# Altium PCB TD_B.pcbdoc
Units mm, origin at the board's own origin, x right, y up, seen from the top; angles counter-clockwise.
Board outline 50.67 x 54.53 mm, 2 copper layers (Top Layer, Bottom Layer); 4 components, 2 nets, 7 pads, 0 vias.
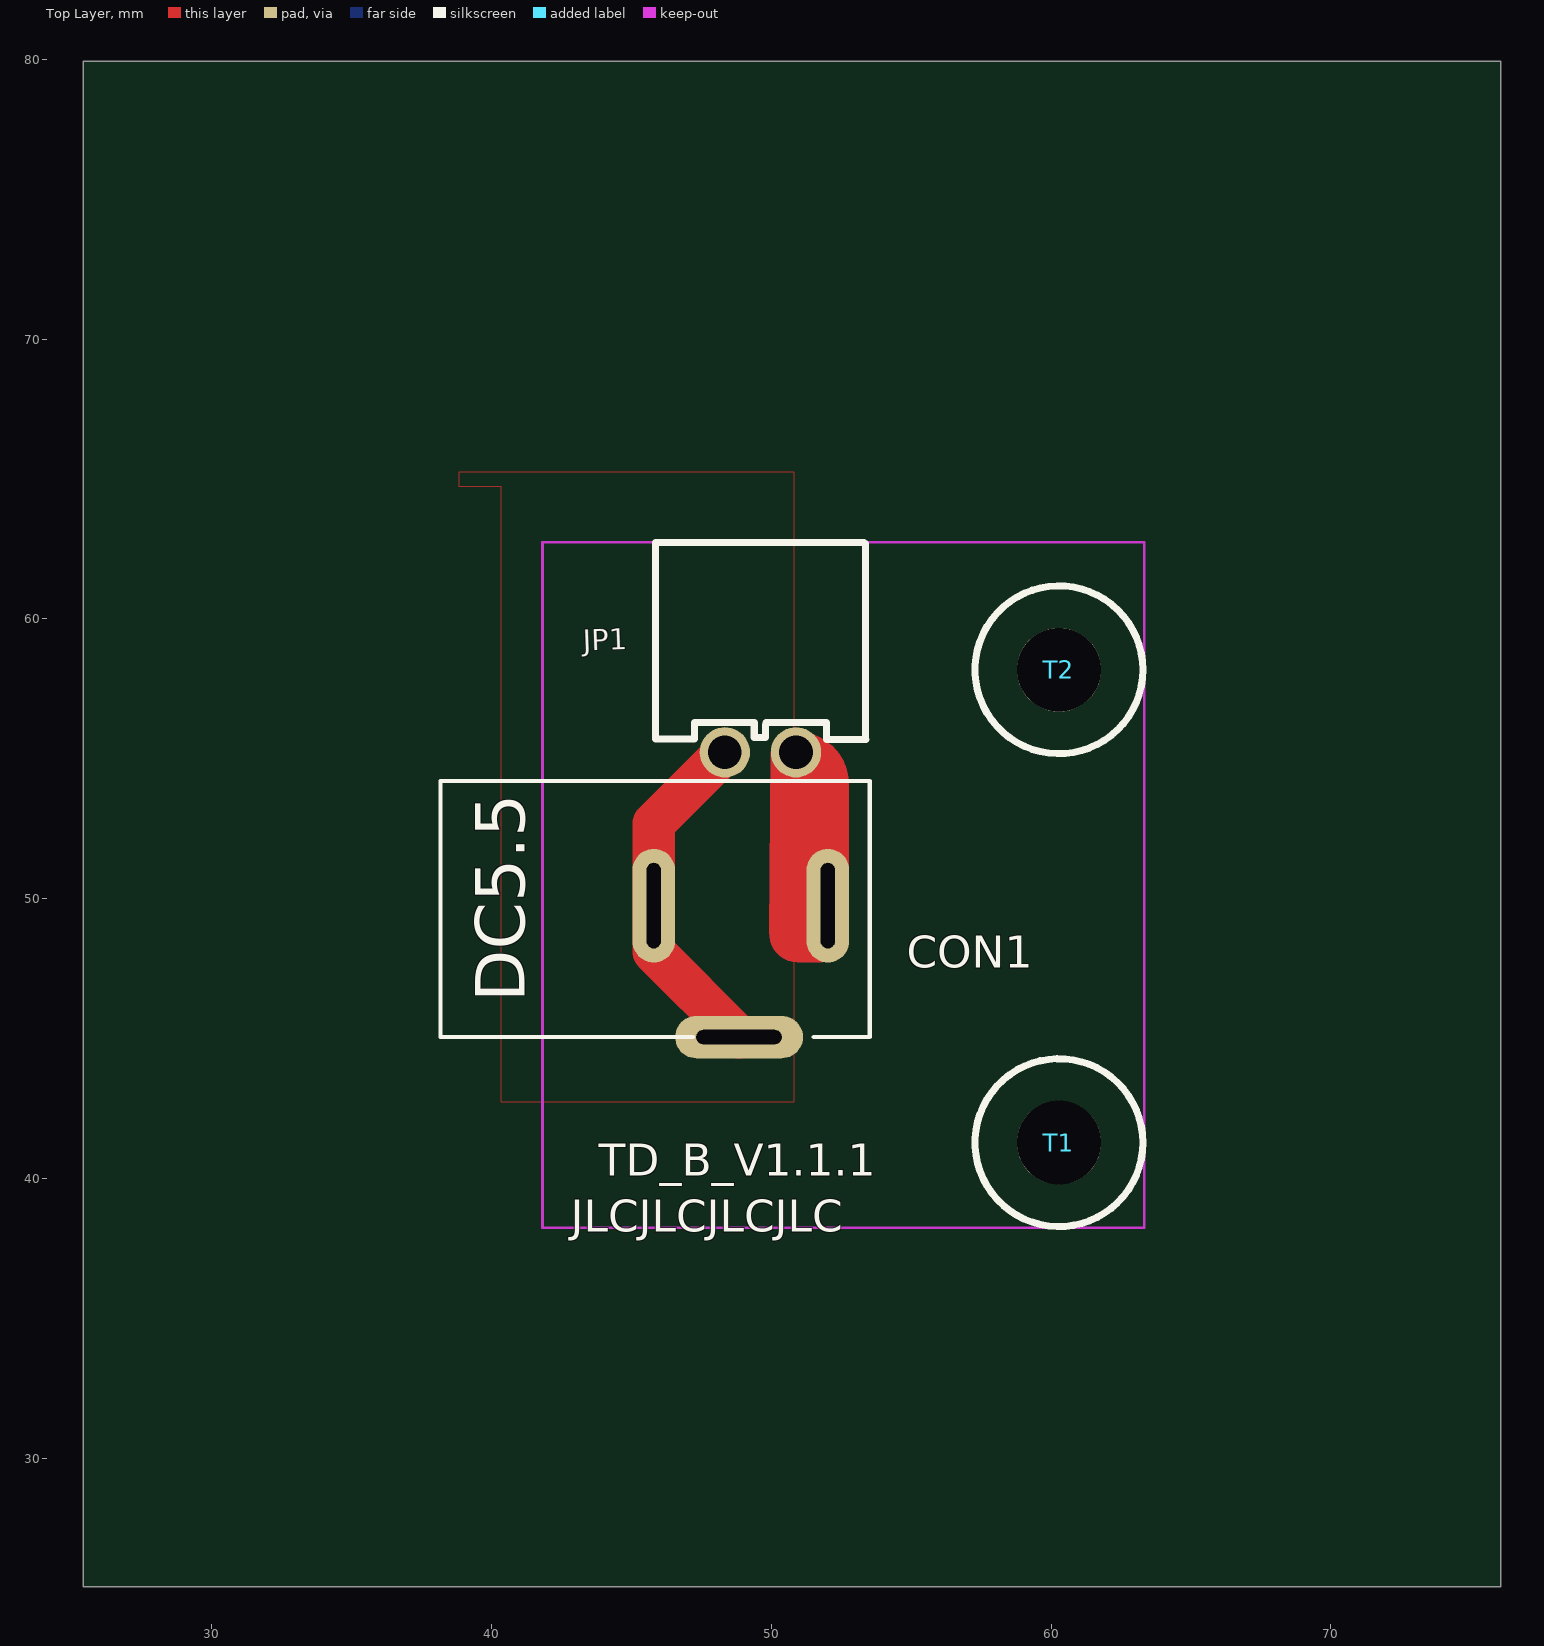
[diagram p0: Top Layer view]
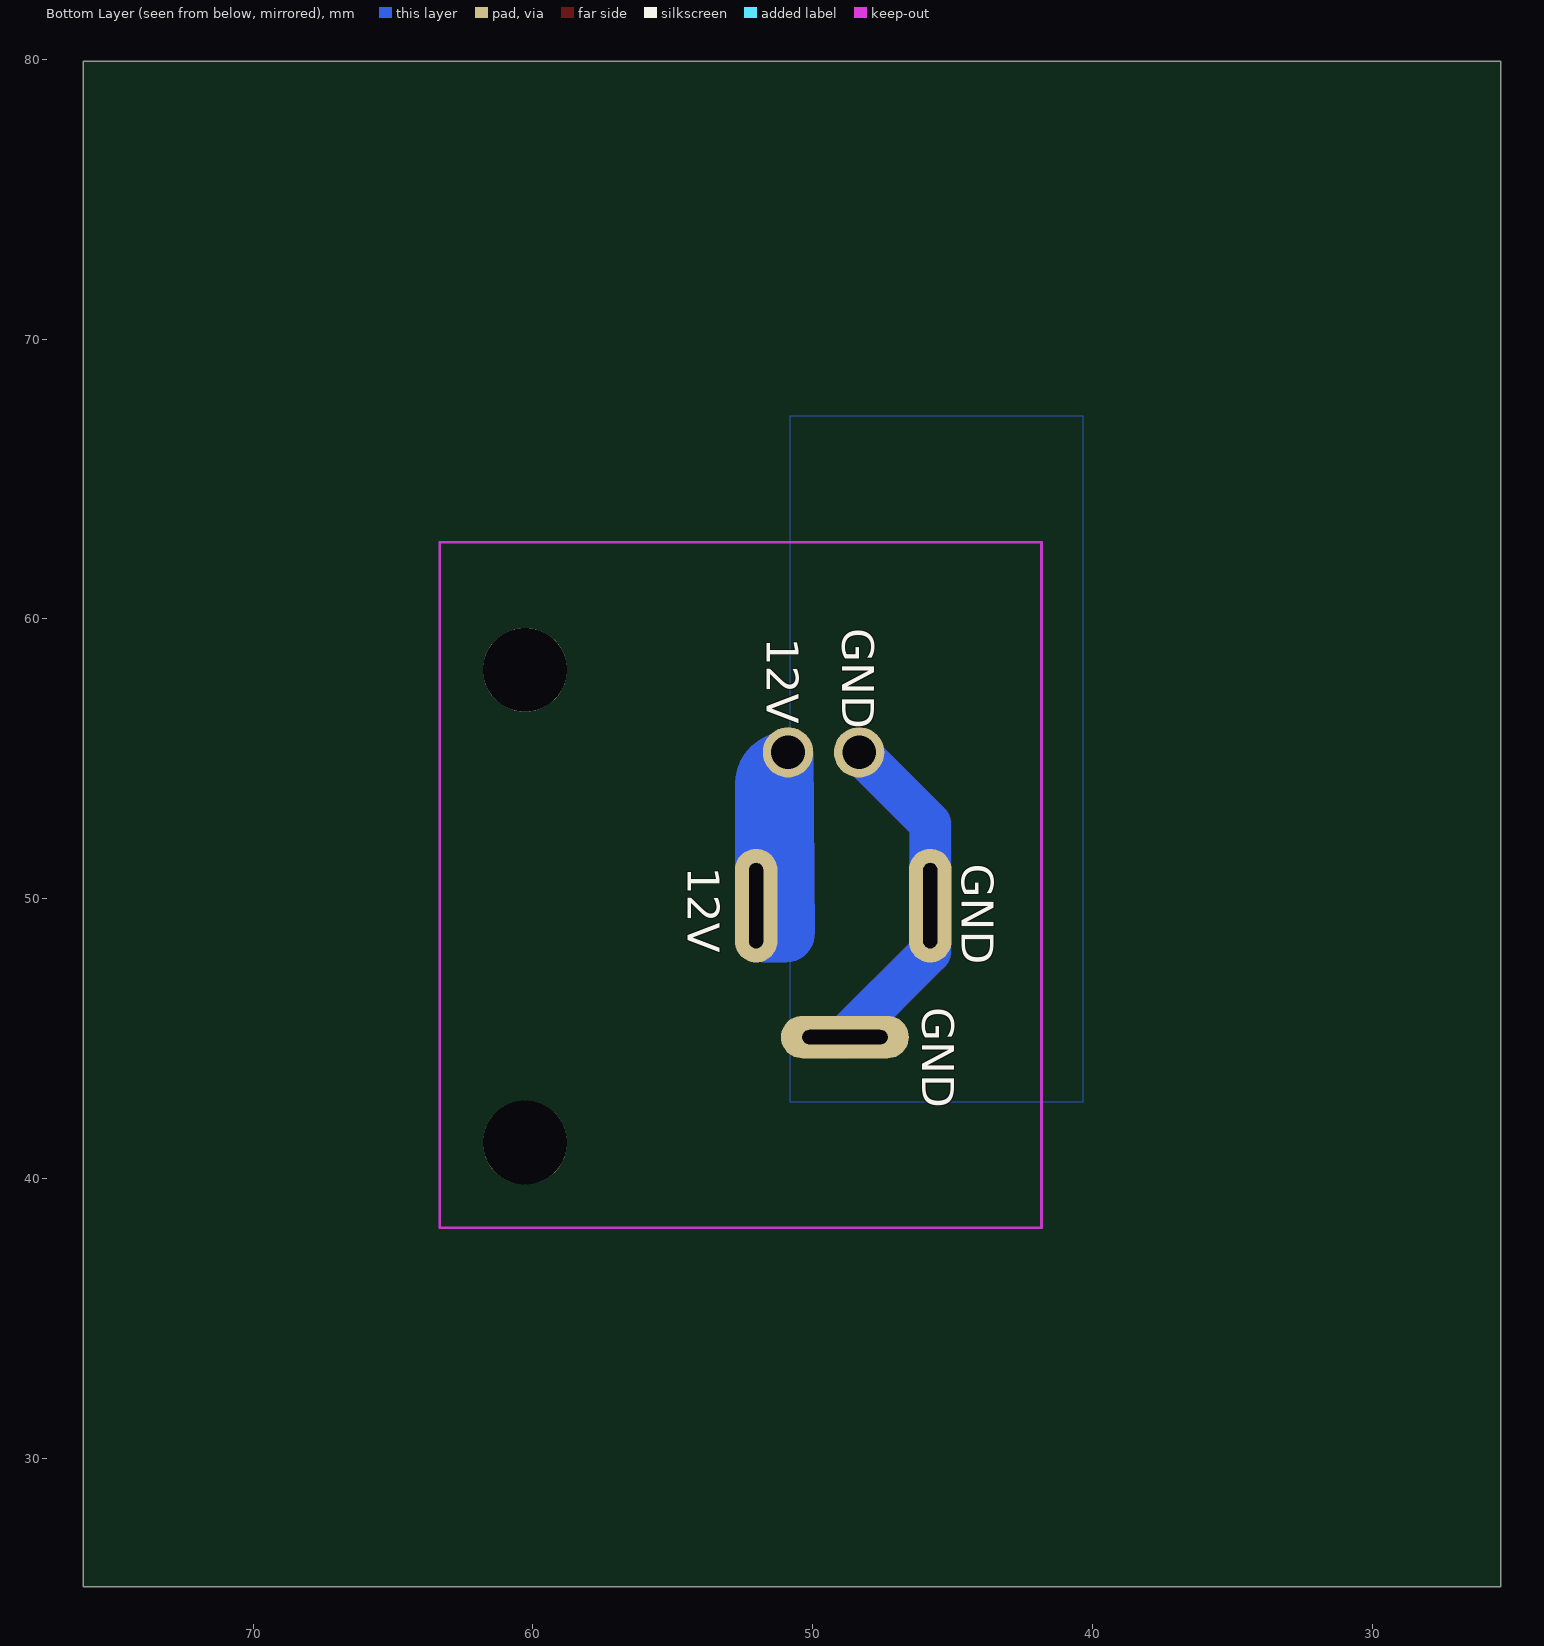
[diagram p1: Bottom Layer view, seen from below]

## Layer stack, top to bottom
Top Layer: signal copper (thickness not stored)
Dielectric: dielectric 0.32, FR-4, Dk 4.8
Bottom Layer: signal copper (thickness not stored)

## Board outline
76.074,25.4 25.4,25.4 25.4,79.935 76.074,79.935

## Components (designator, comment, footprint, x,y, rotation, side; value= is the part's Value field where it differs from the comment)
CON1 "DC_5.5改" DC_5.5改 52.019,49.75 r90 top
JP1 "power" XH2.54-2AW 49.609,55.23 r0 top
T1 "TK_M3" TK_M3 60.279,41.28 r0 top
T2 "TK_M3" TK_M3 60.279,58.18 r0 top

## Footprints (in the part's own frame and the unit in brackets; to place one, negate y for a bottom-side part, rotate by r counter-clockwise, add the part's x,y. Pads: shape width x height; smd on the part's side, far side on the other; paste and mask are expansions set on the pad)
DC_5.5改 [mil]
  oval 160x60 hole 20 slot 120 at 0 deg: 1(0,0) 2(0,245)
  oval 60x180 hole 20 slot 120 at 90 deg: 2(-185,125)
  silkscreen extent -185,-59 175,545
TK_M3 [mm]
  round 3 hole 3: 1(0,0)
  silkscreen extent -3,-3 3,3
XH2.54-2AW [mm]
  round 1.8 hole 1.2: 1(-1.27,0) 2(1.27,0)
  silkscreen extent -3.75,0.46 3.78,7.49

## Nets (pads, with @x,y where several pads share a name; then routed paths per layer and width w, separated by ;. In a path a pad name is that pad's centre, name@x,y a point inside that pad or via, vN(x,y) a via of type N, cw(c..) or ccw(c..) an arc to the next point about the centre after c; other vN are vias at no path point)
GND: CON1.2 JP1.1 | length 25
  Top Layer w1.524: JP1.1 45.796,52.687 45.796,49.75 45.796,48.099 CON1.2@48.844,45.051
  Bottom Layer w1.5: JP1.1 45.796,52.687 45.796,49.75 45.796,48.099 CON1.2@48.844,45.051
VIN: CON1.1 JP1.2 | length 12.3
  Top Layer w1.5: JP1.2 cw(c50.879,54.09) 52.019,54.09 CON1.1
  Bottom Layer w1.5: JP1.2 cw(c50.879,54.09) 52.019,54.09 CON1.1
pads on no net: T1.1 T2.1

## Polygon pours and split planes (outlines as drawn)
GND on Bottom Layer (solid): 50.824,67.235 50.824,42.735 40.324,42.735 40.324,67.235
GND on Top Layer (solid): 50.824,42.735 50.824,65.235 38.824,65.235 38.824,64.735 40.324,64.735 40.324,42.735

## Other copper
Top Layer:
  region net VIN: 50.931,47.734 cw(c50.931,48.734) 50.931,49.734 50.931,47.734
  region net VIN: 51.824,47.735 50.931,47.735 50.931,47.733 50.824,48.235 49.93,48.724 49.98,55.249 51.824,55.249 51.824,54.735
Bottom Layer:
  region net VIN: 50.931,47.734 cw(c50.931,48.734) 50.931,49.734 50.931,47.734
  region net VIN: 51.824,47.735 50.931,47.735 50.931,47.733 50.824,48.235 49.93,48.724 49.98,55.249 51.824,55.249 51.824,54.735

## Silkscreen, mask and mechanical layers (free items; w line width, h text height)
Top Overlay:
  text "TD_B_V1.1.1" at 43.824,40.1 h1.14
  text "JLCJLCJLCJLC" at 42.825,38.1 h1.14
Bottom Overlay:
  text "GND" at 48.944,59.66 h1.14 r90
  text "12V" at 51.634,59.33 h1.14 r90
  text "GND" at 44.664,51.24 h1.14 r90
  text "12V" at 54.454,51.14 h1.14 r90
  text "GND" at 46.074,46.11 h1.14 r90
Document:
  lines w0.003: 50.712,52.642 50.763,52.693

## Text inside footprints (layer, text, board x,y; h text height)
CON1: Top Overlay "DC5.5" at 41.178,46.299 h1.78 r90